# Altium PCB PCB1.PcbDoc (part 6 of 7)
Units mm, origin at the board's own origin, x right, y up, seen from the top; angles counter-clockwise.
Board outline 168 x 107.92 mm, 4 copper layers (Top Layer, POWER_LAYER, GND_LAYER, Bottom Layer), stack 1.182 mm thick; 507 components, 566 nets, 2495 pads, 1244 vias.
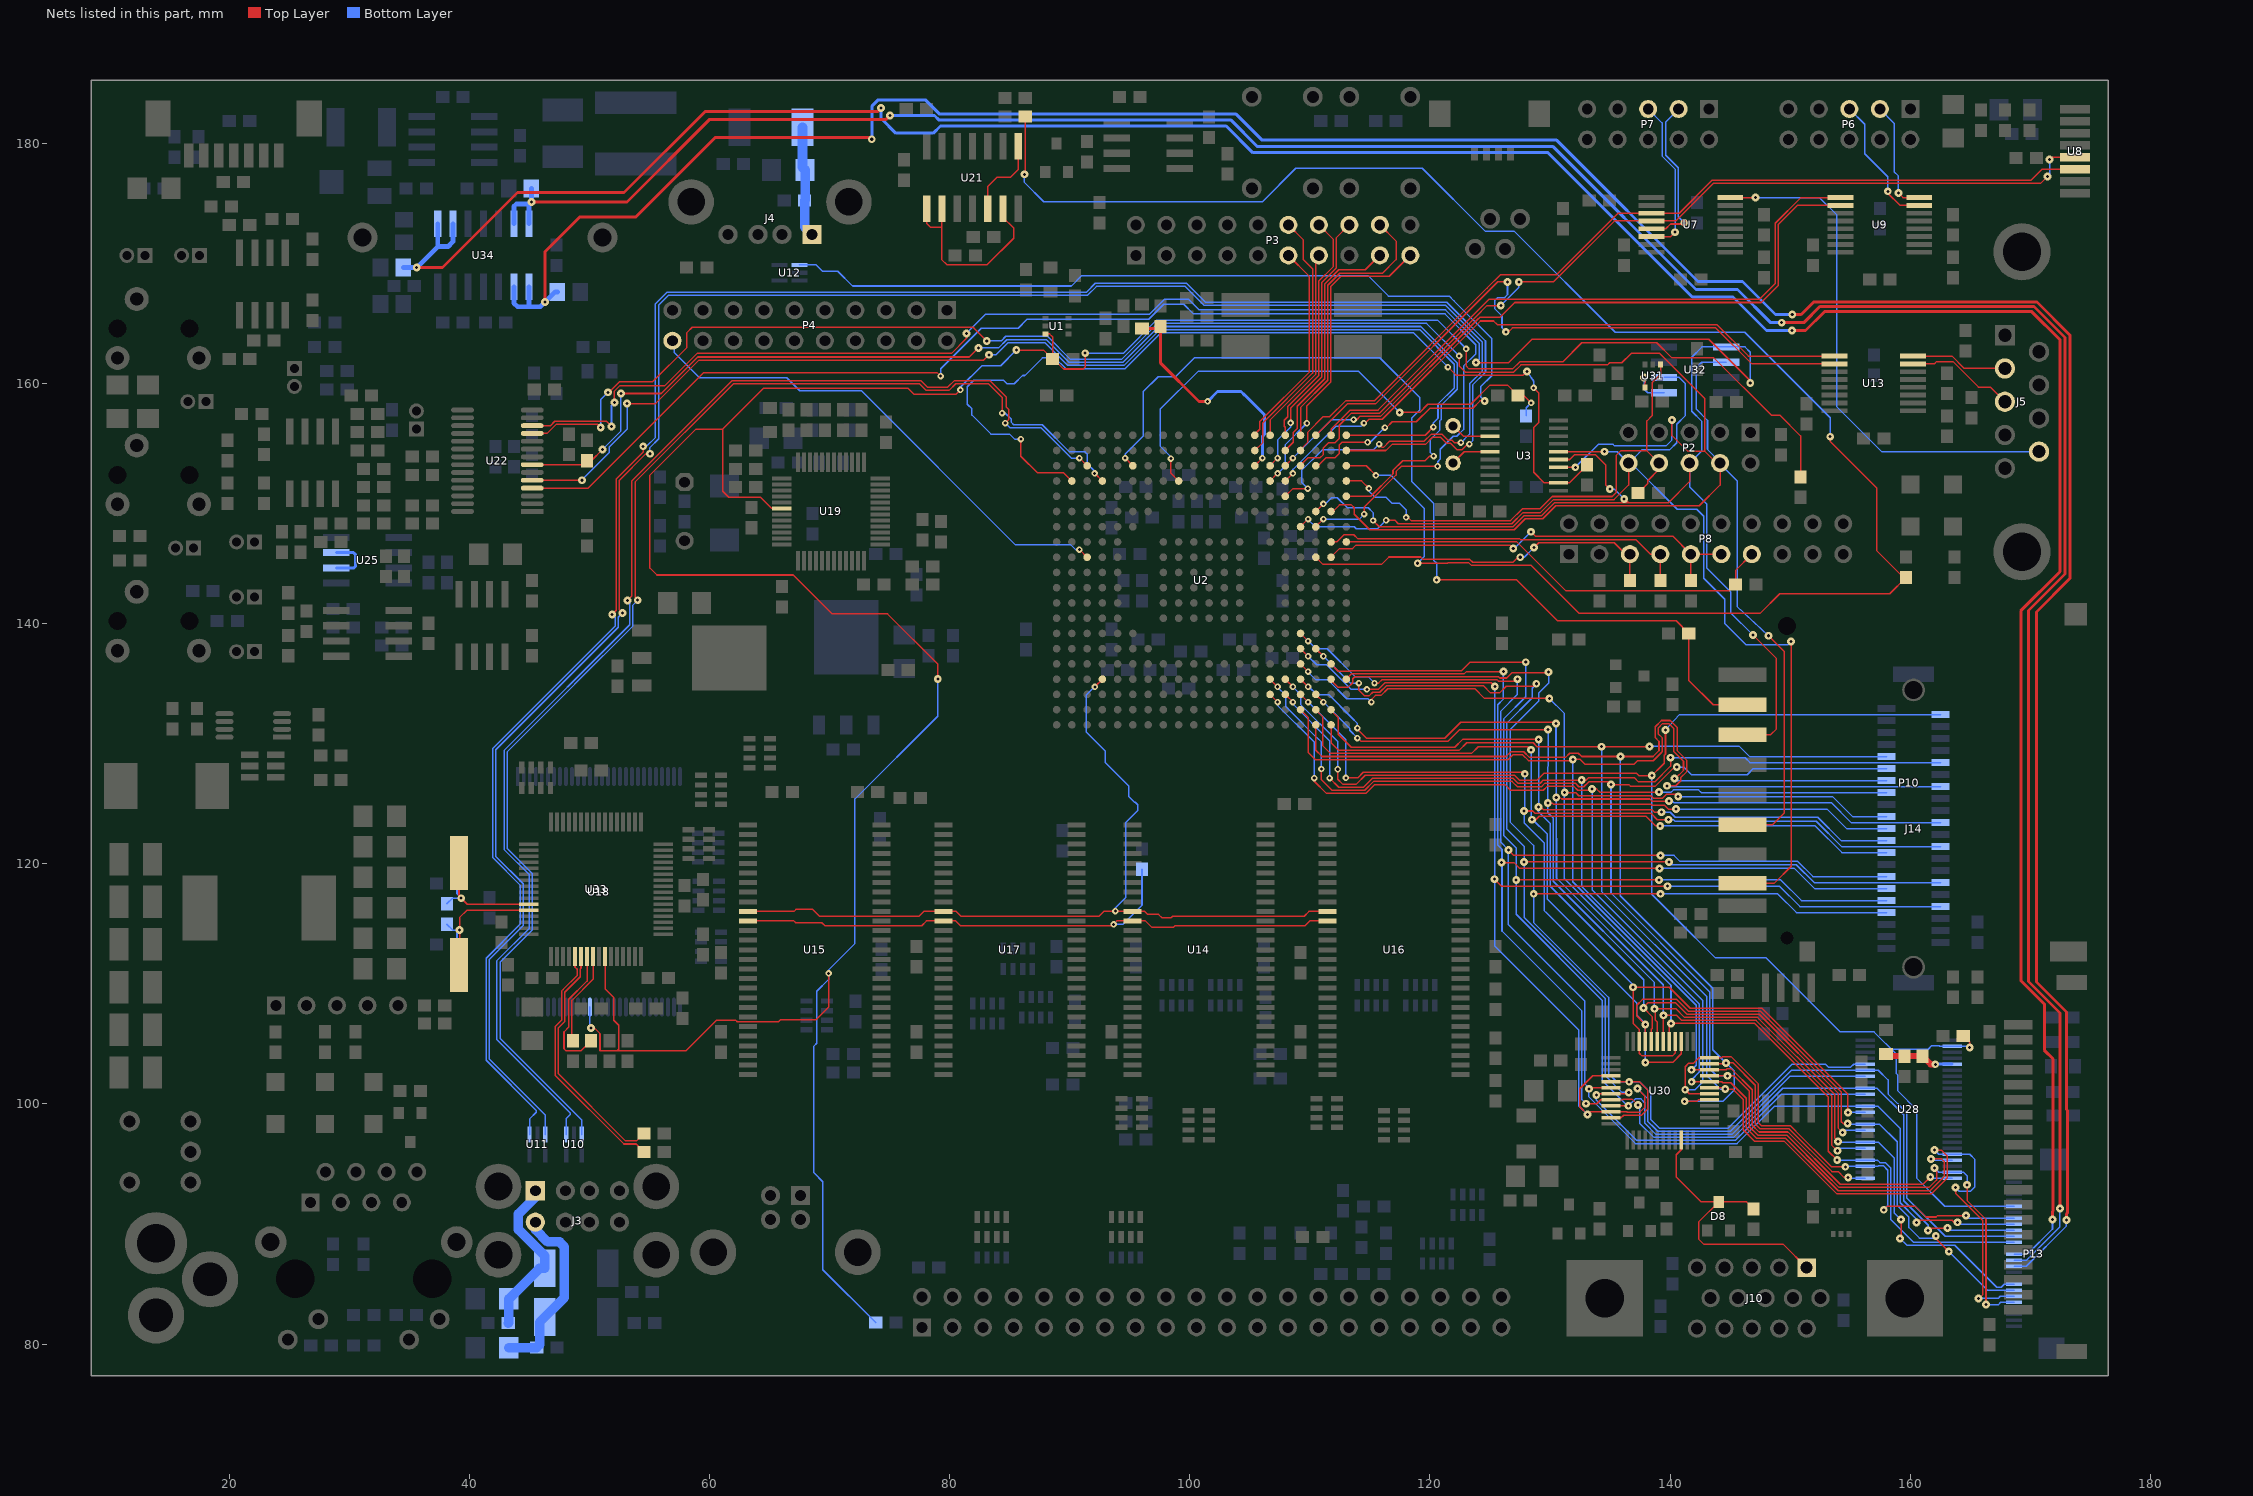
[diagram p8: the nets of this part, all layers, seen from the top]

## Via types
v1: diameter 0.54, hole 0.254, Top Layer to Bottom Layer, tented both sides, 504 vias
v2: diameter 0.65, hole 0.254, Top Layer to Bottom Layer, 387 vias
v3: diameter 0.65, hole 0.254, Top Layer to Bottom Layer, tented both sides, 325 vias
v4: diameter 0.54, hole 0.254, Top Layer to Bottom Layer, 25 vias
v5: diameter 1.27, hole 0.75, Top Layer to Bottom Layer, 2 vias
v6: diameter 0.65, hole 0.254, Top Layer to Bottom Layer, tented bottom, 1 vias

## Nets (pads, with @x,y where several pads share a name; then routed paths per layer and width w, separated by ;. In a path a pad name is that pad's centre, name@x,y a point inside that pad or via, vN(x,y) a via of type N, cw(c..) or ccw(c..) an arc to the next point about the centre after c; other vN are vias at no path point) (continued)
NetU2_V14: U2.V14 U22.4 | length 111.3
  Top Layer w0.127: U22.4@45.212,151.302 49.883,151.302 59.501,160.92 78.94,160.92 v1(79.24,160.62) ; U2.V14@110.49,148.082 110.49,148.09 v1(111.12,148.72) ; v1(114.52,149.14) 114.52,149.72 117.18,152.38 117.18,152.681 117.619,153.12 v1(120.64,153.12)
  Bottom Layer w0.127: v1(79.24,160.62) 79.24,161.24 82.62,164.62 85.7,164.62 86.44,165.36 96.567,165.36 97.827,166.62 99.494,166.62 100.306,165.808 121.252,165.808 123.82,163.24 123.82,162.481 122.8,161.461 122.8,156.18 122.24,155.62 121.94,155.62 120.86,154.54 120.86,153.72 120.64,153.5 v1(120.64,153.12) ; v1(111.12,148.72) 114.12,148.72 v1(114.52,149.14)
NetU2_V18: U2.V18 U12.1 | length 83.4
  Top Layer w0.127: U2.V18@110.49,153.162 110.682,153.162 111.34,153.82 112.08,153.82 112.44,154.18 112.44,154.88 112.68,155.12 v1(114.8,155.12) ; v1(116.24,156.34) 116.38,156.34 116.86,156.82 118.861,156.82 120.001,157.96 123.56,157.96 124.16,158.56 v3(124.56,158.56)
  Bottom Layer w0.127: U12.1@67.475,169.89 68.87,169.89 69.39,169.37 70.67,169.37 71.906,168.134 90.135,168.134 91.001,169 114.84,169 116.545,167.295 121.605,167.295 122.006,166.894 ; v1(114.8,155.12) 115.02,155.12 v1(116.24,156.34) ; 122.006,166.894 125.14,163.76 125.14,160.66 124.214,159.734 124.214,158.906 v3(124.56,158.56)
NetU2_Y20: U2.Y20 U22.5 | length 99.8
  Top Layer w0.127: U22.5@45.212,151.952 v3(49.372,151.952) ; v3(53.12,158.34) 55.484,158.34 59.104,161.96 82.82,161.96 v3(83.26,162.4) ; U2.Y20@113.03,155.702 119.602,155.702 v1(120.28,156.38)
  Bottom Layer w0.127: v3(49.372,151.952) 49.372,151.992 49.677,152.297 51.635,154.255 51.635,154.716 53.12,156.201 v3(53.12,158.34) ; v3(83.26,162.4) 83.84,162.4 84.84,163.4 87.941,163.4 89.826,161.515 94.518,161.515 97.503,164.5 119.14,164.5 122.02,161.62 122.02,159.644 120.67,158.294 120.67,157.117 120.28,156.727 v1(120.28,156.38)
NetU3_3: U3.3 Y2.2 | length 3.4
  Top Layer w0.127: Y2.2@121.92,156.49 122.778,155.632 U3.3@125.008,155.632
NetU3_5: U3.5 Y2.1 | length 3.5
  Top Layer w0.127: Y2.1@121.92,153.39 122.862,154.332 U3.5@125.008,154.332
NetU21_1: U21.1 U21.2 U21.6 | length 17.7
  Top Layer w0.127: U21.1@78.078,174.572 78.078,173.33 78.388,173.02 ; U21.2@79.348,174.572 79.348,173.02 ; U21.6@84.428,174.572 84.428,173.852 85.32,172.96 85.32,172.12 83.12,169.92 79.74,169.92 79.348,170.312 79.348,172.06 79.348,173.02 ; 78.388,173.02 79.348,173.02 ; 78.388,173.02 79.348,173.02
NetU21_5: U21.5 U21.8 | length 6.9
  Top Layer w0.127: U21.5@83.158,174.572 83.158,176.418 83.94,177.2 85.06,177.2 85.698,177.838 U21.8@85.698,179.772
NetU25_6: U25.6 U25.7 | length 4.3
  Bottom Layer w0.25: U25.6@28.896,144.653 30.373,144.653 30.48,144.76 30.48,145.78 30.337,145.923 U25.7@28.896,145.923
NetU31_4: U31.4 U32.1 | length 3.6
  Top Layer w0.127: v3(137.84,160.52) 137.92,160.36 U31.4@137.912,159.694
  Bottom Layer w0.127: v3(137.84,160.52) 137.84,159.54 138.134,159.246 U32.1@139.498,159.246
P0: J14.29 P13.8 U2.U7 U28.13 U30.18 | length 139
  Top Layer w0.127: U2.U7@109.22,139.192 109.85,138.562 v1(109.85,138.56) ; v1(115.38,135.06) 115.72,135.06 115.998,135.338 125.583,135.338 125.701,135.22 127.12,135.22 v3(127.28,135.38) ; v3(126.54,121.14) 126.98,120.7 v3(139.2,120.7) ; v3(133.24,101.26) 133.322,101.342 U30.18@135.092,101.342 ; v3(160.54,90.12) 160.72,90.3 163.5,90.3 163.66,90.14 v3(163.94,90.14)
  Bottom Layer w0.127: v1(109.85,138.56) 109.86,138.56 110.5,137.92 111.44,137.92 113.76,135.6 114.84,135.6 v1(115.38,135.06) ; v3(127.28,135.38) 127.28,134.1 125.908,132.728 125.908,121.792 126.54,121.16 126.54,114.92 132.908,108.552 132.908,101.666 133.234,101.34 v3(133.24,101.26) 133.24,100.58 137.12,96.7 145.58,96.7 148.69,99.81 157.33,99.81 159.18,97.96 159.18,91.76 160.54,90.4 v3(160.54,90.12) ; v3(139.2,120.7) 140.34,120.7 140.84,120.2 150.64,120.2 151.904,118.936 J14.29@158.036,118.936 ; v3(163.94,90.14) 164.268,89.972 P13.8@168.656,89.972
P1: J14.30 U2.V6 U28.15 U30.19 | length 124.8
  Top Layer w0.127: U2.V6@110.49,137.922 v1@111.12,137.292 ; v1(114.08,135.06) 114.08,134.46 114.52,134.02 114.96,134.02 115.226,134.286 115.826,134.286 116.37,134.83 124.45,134.83 125.04,134.24 125.8,134.24 126.36,134.8 128.66,134.8 v3(128.86,135) ; v3(127.84,120.16) v3(139.9,120.16) ; v3(133.86,100.74) 133.962,100.842 136.442,100.842 v3(136.56,100.96)
  Bottom Layer w0.127: v1@111.13,137.29 113.36,135.06 v1(114.08,135.06) ; v3@128.86,134.96 128.52,134.62 128.52,133.84 126.416,131.736 126.416,122.884 127.872,121.428 127.872,115.508 134.62,108.76 134.62,102.34 136,100.96 v3(136.56,100.96) ; v3@133.92,100.74 v3(133.86,100.74) 133.86,100.319 137.225,96.954 145.434,96.954 149.29,100.81 U28.15@156.254,100.81 ; v3(139.9,120.16) 140.14,119.92 150.52,119.92 152.004,118.436 J14.30@162.536,118.436
  other v1: 111.12,137.29
P2: J14.31 P13.9 U2.Y4 U28.16 U30.20 | length 134.7
  Top Layer w0.127: U2.Y4@113.03,135.382 113.03,135.39 113.486,135.846 122.866,135.846 123.04,136.02 v3(126.12,136.02) ; v3(125.96,120.1) 127,120.1 127.48,119.62 v3(139.12,119.62) ; v3(133,100.02) 133.9,100.02 134.222,100.342 U30.20@135.092,100.342 ; U30.20@135.095,100.288 136.022,100.342 136.08,100.4 136.84,100.4 v3(137.34,99.9) ; v3(161.5,89.46) 161.7,89.66 v3(163.1,89.66)
  Bottom Layer w0.127: v3(126.12,136.02) 126.12,133.72 125.654,133.254 125.654,121.566 126,121.22 126,114.4 132.654,107.746 132.654,100.366 v3(133,100.02) ; v3(137.34,99.9) 137.48,99.76 137.48,98.38 138.652,97.208 145.288,97.208 149.39,101.31 157.25,101.31 159.46,99.1 159.46,91.94 161.5,89.9 v3(161.5,89.46) ; v3(139.12,119.62) 150.36,119.62 152.044,117.936 J14.31@158.036,117.936 ; v3(163.1,89.66) 163.288,89.472 P13.9@168.656,89.472
P3: J14.33 U2.W5 U28.18 U30.21 | length 116
  Top Layer w0.127: U2.W5@111.76,136.652 111.76,136.64 112.36,136.04 113.32,136.04 113.38,136.1 122.64,136.1 123.34,136.8 v3(127.98,136.8) ; v3(127.18,118.66) v3(139.08,118.66) ; U30.21@135.092,99.842 v3(136.52,99.84)
  Bottom Layer w0.127: v3(127.98,136.8) 127.98,133.92 126.162,132.102 126.162,122.338 127.183,121.317 127.183,115.797 134.36,108.62 134.36,101.94 136.46,99.84 v3(136.52,99.84) 137.1,100.42 137.58,100.42 137.9,100.1 137.9,98.4 138.838,97.462 145.154,97.462 150.002,102.31 U28.18@156.254,102.31 ; v3(139.08,118.66) 149.22,118.66 150.944,116.936 J14.33@158.036,116.936
P4: J14.34 P13.10 U2.U6 U28.19 U30.16 U30.22 | length 154.6
  Top Layer w0.127: U2.U6@109.22,137.922 109.85,137.292 v1(109.85,137.29) ; v1@114.74,134.54 115.72,134.54 116.264,135.084 125.096,135.084 v3(125.4,134.78) ; v3(125.38,118.72) 125.96,118.14 v3(139.78,118.14) ; U30.16@135.092,102.342 133.562,102.342 132.48,101.26 132.48,99.76 v3(133.12,99.12) 133.342,99.342 136.387,99.342 136.409,99.32 137.506,99.32 137.88,99.694 137.88,100.68 v3(137.28,101.28)
  Bottom Layer w0.127: v1(109.85,137.29) 110.56,136.58 111.38,136.58 113.42,134.54 v1@114.74,134.54 ; v3(125.4,134.78) 125.4,113.16 132.4,106.16 132.4,99.84 v3(133.12,99.12) ; v3(137.28,101.28) 138.154,100.406 138.154,98.505 138.943,97.716 145.034,97.716 150.128,102.81 157.35,102.81 158.162,101.998 158.162,100.818 159.72,99.26 159.72,92.172 162.92,88.972 P13.10@168.656,88.972 ; 138.48,98.22 138.984,97.716 ; v3(139.78,118.14) 149.12,118.14 150.824,116.436 J14.34@162.536,116.436
  other v1: 114.74,134.54
P5: J14.35 U2.W4 U28.20 U30.17 U30.23 | length 122.7
  Top Layer w0.127: U2.W4@111.76,135.382 111.76,135.3 112.36,134.7 113.18,134.7 113.56,135.08 113.56,135.42 113.732,135.592 125.688,135.592 125.8,135.48 126.4,135.48 126.82,135.9 129.8,135.9 v3(129.88,135.98) ; v3(128.64,117.5) v3(139.2,117.5) ; U30.23@135.092,98.842 135.922,98.842 136.14,99.06 137.62,99.06 138.134,99.574 138.134,101.168 137.46,101.842 U30.17@135.092,101.842
  Bottom Layer w0.127: v3(129.88,135.98) 129.88,135.04 129.06,134.22 129.06,133.56 126.67,131.17 126.67,123.49 128.63,121.53 128.63,115.11 134.874,108.866 134.874,102.526 135.558,101.842 137.46,101.842 138.408,100.894 138.408,98.672 139.11,97.97 144.83,97.97 150.17,103.31 152.94,103.31 153.186,103.064 155.054,103.064 155.3,103.31 U28.20@156.254,103.31 ; v3(139.2,117.5) 148.96,117.5 150.524,115.936 J14.35@158.036,115.936
  other v3: 136.598,101.842
P6: J14.19 P13.11 U2.U5 U28.4 U30.5 | length 125
  Top Layer w0.127: U2.U5@109.22,136.652 v1@109.85,136.022 ; v1(115.12,133.48) 115.12,133.7 115.452,134.032 115.932,134.032 116.476,134.576 123.744,134.576 124.54,133.78 v3(129.94,133.78) ; v3(131.22,125.94) 132.141,125.94 132.401,125.68 138.4,125.68 138.62,125.46 139.36,125.46 139.68,125.78 140.5,125.78 v3(140.68,125.6) ; U30.5@139.942,105.192 139.942,106.562 v3(140.08,106.7) 147.06,106.7 153.18,100.58 153.18,96.06 v3(153.92,95.32)
  Bottom Layer w0.127: v1(109.85,136.02) 109.85,135.97 110.5,135.32 111.5,135.32 113.06,133.76 114.84,133.76 v1(115.12,133.48) ; v3(129.94,133.78) 131.2,132.52 131.2,118.76 140.08,109.88 v3(140.08,106.7) ; v3(140.68,125.6) 153.54,125.6 155.204,123.936 J14.19@158.036,123.936 ; v3(153.92,95.32) 153.93,95.31 157.29,95.31 157.486,95.114 157.926,95.114 158.4,94.64 158.4,90.36 160.288,88.472 P13.11@168.656,88.472
P7: J14.20 U2.U4 U28.6 U30.6 | length 111.2
  Top Layer w0.127: U2.U4@109.22,135.382 v1@109.85,134.752 ; v1(113.96,131.3) 113.96,131.22 114.715,130.465 121.225,130.465 122.56,131.8 130.38,131.8 v3(130.5,131.68) ; v3(130.52,125.52) 130.84,125.52 130.96,125.4 138.321,125.4 138.521,125.2 139.76,125.2 v3(139.9,125.24) ; U30.6@139.442,105.192 v3(139.442,107.378) 140.542,107.378 140.966,106.954 147.166,106.954 153.46,100.66 153.46,96.58 v3(153.94,96.1)
  Bottom Layer w0.127: v1(109.85,134.75) 109.91,134.75 110.56,134.1 111.56,134.1 113.49,132.17 113.96,131.7 v1(113.96,131.3) ; v3(130.5,131.68) 130.519,125.52 130.54,118.82 139.442,109.918 v3(139.442,107.378) ; v3(139.9,125.24) 140.18,125.24 140.34,125.08 153.44,125.08 155.084,123.436 J14.20@162.536,123.436 ; v3(153.94,96.1) 154.15,96.31 U28.6@156.254,96.31
P8: J14.21 P13.18 U2.V3 U28.7 U30.7 | length 125.7
  Top Layer w0.127: U2.V3@110.49,134.112 v1@111.12,133.482 ; v1(113.96,130.48) 113.997,130.48 114.266,130.211 121.511,130.211 122.48,131.18 v3(129.84,131.18) ; v3(129.82,125.06) 130.2,125.06 130.3,124.96 138.402,124.96 138.482,124.88 139.531,124.88 139.851,124.56 v3(140.5,124.56) ; U30.7@138.942,105.192 138.942,106.82 138.754,107.008 138.754,107.866 v3(138.7,107.92) 140.494,107.92 141.206,107.208 147.292,107.208 153.72,100.78 153.72,97.16 v3(154,96.88) ; v3(159.16,88.8) 159.24,88.88 v3(159.24,90.36)
  Bottom Layer w0.127: v1(111.12,133.48) 113.32,131.28 113.32,131.12 v1(113.96,130.48) ; v3(129.82,125.06) 129.82,124.26 130.27,123.81 130.27,118.55 138.7,110.12 v3(138.7,107.92) ; v3@129.83,125.06 v3(129.84,131.18) ; v3(140.5,124.56) 153.08,124.56 154.704,122.936 J14.21@158.036,122.936 ; v3@154.07,96.81 157.37,96.81 158.66,95.52 158.66,90.94 v3(159.24,90.36) ; v3(159.16,88.8) 159.742,88.218 163.722,88.218 167.214,84.726 167.586,84.726 167.832,84.972 P13.18@168.656,84.972
P9: J14.23 U2.W2 U28.9 U30.8 | length 103.9
  Top Layer w0.127: U2.W2@111.76,132.842 111.76,132.78 112.36,132.18 112.36,130.789 113.446,129.703 122.063,129.703 122.72,130.36 v3(129.06,130.36) ; v3(129.04,124.74) 129.22,124.74 129.44,124.52 138.482,124.52 138.702,124.3 v3(139.28,124.3) ; U30.8@138.442,105.192 138.442,106.222 138.5,106.28 138.5,107.28 v3(137.8,107.98) 137.8,108.06 138.18,108.44 140.428,108.44 141.406,107.462 147.438,107.462 154,100.9 154,98 v3(154.38,97.62)
  Bottom Layer w0.127: v3(129.04,124.74) 129.04,124.34 130.016,123.364 130.016,118.124 137.8,110.34 v3(137.8,107.98) ; v3@129.05,124.74 v3(129.06,130.36) ; v3(139.28,124.3) 140.02,124.3 140.44,123.88 152.3,123.88 154.244,121.936 J14.23@158.036,121.936 ; v3(154.38,97.62) 154.57,97.81 U28.9@156.254,97.81
P10: J14.24 P13.19 U2.U3 U28.10 U30.3 U30.9 | length 142.3
  Top Layer w0.127: U2.U3@109.22,134.112 v1@109.85,133.482 ; v1(113,127.16) 113.98,127.16 114.446,127.626 127.774,127.626 v3(127.9,127.5) ; v3(127.84,124.4) 128.56,124.4 128.74,124.22 129.36,124.22 ; 129.37,124.23 138.39,124.23 138.94,123.68 v3(139.88,123.68) ; v2(137.94,103.46) 140.22,103.46 140.942,104.182 U30.3@140.942,105.192 ; v3@137.94,106.62 137.22,107.34 137.22,108.22 137.7,108.7 140.562,108.7 141.546,107.716 147.544,107.716 154.26,101 154.26,98.52 154.42,98.36 v3(154.8,98.36) ; U30.9@137.942,105.192 v3(137.942,106.62) ; v3(162.14,89) 162.14,88.78 v3(163.22,87.7)
  Bottom Layer w0.127: v1@109.86,133.48 111.5,131.84 113,130.34 v1(113,127.16) ; v3(127.84,124.4) 127.84,123.42 129.508,121.752 129.508,116.112 129.741,115.879 137.24,108.38 137.24,107.38 v3@137.942,106.678 ; v3@127.9,124.4 v3(127.9,127.5) ; v2@137.942,103.462 v3(137.942,106.62) ; v3(139.88,123.68) 140.281,123.68 140.421,123.54 152.18,123.54 154.284,121.436 J14.24@162.536,121.436 ; v3@154.85,98.31 157.45,98.31 158.92,96.84 158.92,91.54 159.9,90.56 159.9,89.7 160.78,88.82 162.02,88.82 v3(162.14,89) ; v3(163.22,87.7) 166.448,84.472 P13.19@168.656,84.472
  other v1: 109.85,133.48
P11: J14.25 U2.V2 U28.12 U30.4 U30.10 | length 109.8
  Top Layer w0.127: U2.V2@110.49,132.842 110.49,132.81 111.08,132.22 111.08,129.821 111.706,129.195 123.455,129.195 124.02,129.76 128.16,129.76 v3(128.42,129.5) ; v3(128.5,123.68) 128.82,123.68 129.106,123.966 137.994,123.966 138.8,123.16 v3(139.18,123.16) ; U30.4@140.442,105.192 140.442,104.24 140.202,104 137.66,104 137.442,104.218 137.442,106.198 136.92,106.72 v3(136.92,109.72) 139.936,109.72 141.686,107.97 147.65,107.97 154.82,100.8 v3(154.82,99.28)
  Bottom Layer w0.127: v3(128.42,129.5) 128.428,125.28 v3@128.43,123.68 ; v3(128.5,123.68) 128.556,123.68 129.762,122.474 129.762,117.078 130.081,116.759 136.92,109.92 v3(136.92,109.72) ; v3(139.18,123.16) 152.1,123.16 154.324,120.936 J14.25@158.036,120.936 ; v3(154.82,99.28) 154.85,99.31 U28.12@156.254,99.31
P12: J14.9 P13.20 U2.W1 U28.44 U30.43 | length 131.6
  Top Layer w0.127: U2.W1@111.76,131.572 111.76,130.095 112.406,129.449 122.429,129.449 123.06,130.08 128.6,130.08 128.92,129.76 138.28,129.76 v3(138.3,129.78) ; U30.43@143.292,101.342 144.498,101.342 v3(144.6,101.24) 145.219,101.24 146.09,100.369 146.09,97.85 147.06,96.88 149.524,96.88 152.86,93.544 153.904,92.5 161.76,92.5 163.1,93.84 163.1,95.66 162.6,96.16 v3(162.04,96.16) ; v3(163.78,93.04) 163.78,92.561 166.066,90.275 166.066,84.126 165.74,83.8 v3(165.7,83.8)
  Bottom Layer w0.127: v3(134.3,129.76) 134.3,117.7 143.054,108.946 143.054,102.366 144.18,101.24 v3(144.6,101.24) ; v3(138.3,129.78) 145.78,129.78 146.624,128.936 J14.9@158.036,128.936 ; v3(162.04,96.16) 162.39,95.81 164.97,95.81 165.4,95.38 165.4,93.1 165.026,92.726 164.094,92.726 v3(163.78,93.04) ; v3(165.7,83.8) 167.34,83.8 167.512,83.972 P13.20@168.656,83.972
P13: J14.10 U2.T3 U28.45 U30.44 | length 122.4
  Top Layer w0.127: U2.T3@107.95,134.112 108.58,133.482 v1(108.58,133.48) ; v1(111.64,127.14) 112.4,126.38 114.462,126.38 115.2,127.118 126.943,127.118 127.341,126.72 129.18,126.72 129.44,126.98 133.021,126.98 133.221,127.18 137.02,127.18 137.38,126.82 138.72,126.82 140.04,128.14 v3(140.04,128.84) ; v3(141.8,101.84) U30.44@143.292,101.842 144.302,101.842 144.384,101.76 145.058,101.76 146.344,100.474 146.344,97.988 147.192,97.14 149.623,97.14 153.214,93.549 154.003,92.76 161.661,92.76 162.846,93.945 162.846,95.194 162.62,95.42 v3(161.74,95.42)
  Bottom Layer w0.127: v1(108.58,133.48) 108.58,133.32 111.64,130.26 v1(111.64,127.14) ; v3(132.64,126.98) 132.64,118.12 142.44,108.32 142.44,102.66 141.8,102.02 v3(141.8,101.84) ; v3(140.04,128.84) 146.256,128.84 146.66,128.436 J14.10@162.536,128.436 ; v3(161.74,95.42) 161.85,95.31 U28.45@163.504,95.31
P14: J14.11 P13.21 U2.R4 U28.47 U30.45 | length 131.2
  Top Layer w0.127: U2.R4@106.68,135.382 v1@107.31,134.752 ; v1(110.96,127.9) 110.96,127 111.84,126.12 114.561,126.12 115.301,126.86 126.842,126.86 127.282,126.42 129.28,126.42 129.586,126.726 132.094,126.726 132.4,126.42 132.82,126.42 133.22,126.82 134.86,126.82 v3(135.08,126.6) 136.58,126.6 136.7,126.48 138.78,126.48 140.36,128.06 v3(140.56,128.06) ; U30.45@143.292,102.342 145.325,102.342 146.598,101.069 146.598,98.1 147.298,97.4 149.722,97.4 152.976,94.146 154.082,93.04 161.582,93.04 162.2,93.658 162.2,94.5 v3(162.04,94.66) ; v3(164.74,93.26) 164.74,91.96 166.32,90.38 v3(166.32,83.28)
  Bottom Layer w0.127: v1(107.31,134.75) 107.31,134.71 108,134.02 108,133.08 110.59,130.49 ; 110.6,130.5 110.96,130.14 v1(110.96,127.9) ; v3(135.08,126.6) 135.08,117.56 143.308,109.332 143.308,102.932 143.898,102.342 v3(144.798,102.342) ; v3(140.56,128.06) 141.14,128.06 141.78,127.42 146.424,127.42 146.94,127.936 J14.11@158.036,127.936 ; v3(162.04,94.66) 162.39,94.31 164.45,94.31 164.74,94.02 v3(164.74,93.26) ; v3(166.32,83.28) 167.36,83.28 167.552,83.472 P13.21@168.656,83.472
P15: J14.13 U2.U2 U28.48 U30.46 | length 120
  Top Layer w0.127: U2.U2@109.22,132.842 109.22,132.84 109.86,132.2 109.86,129.28 110.453,128.687 126.527,128.687 126.92,129.08 127.72,129.08 128.2,128.6 131.8,128.6 v3(131.9,128.7) 132.521,128.7 132.921,128.3 137,128.3 137.28,128.58 138.6,128.58 ; 139.306,129.286 138.6,128.58 ; v3(140.36,127.12) 140.46,127.12 141.12,127.78 141.12,128.54 140.3,129.36 140.3,131.28 139.9,131.68 139.38,131.68 139.02,131.32 139.02,130.82 139.366,130.474 139.366,129.366 138.6,128.6 138.6,128.58 ; v3(141.782,102.842) 144.672,102.842 144.741,102.911 145.115,102.911 146.852,101.174 146.852,98.228 147.42,97.66 149.822,97.66 154.182,93.3 161.08,93.3 v3(161.68,93.9)
  Bottom Layer w0.127: v3(131.9,128.7) 131.9,118.5 142.18,108.22 142.18,103.22 141.802,102.842 v3(141.782,102.842) ; v3(140.36,127.12) 140.544,126.936 J14.13@158.036,126.936 ; v3(161.68,93.9) 161.77,93.81 U28.48@163.504,93.81
P16: J14.14 U2.V1 U28.1 U30.41 U30.47 | length 122.5
  Top Layer w0.127: U2.V1@110.49,131.572 110.49,129.457 111.006,128.941 126.341,128.941 126.74,129.34 127.82,129.34 128.3,128.86 131.28,128.86 131.64,129.22 132.36,129.22 132.64,128.94 138.58,128.94 139.08,129.44 139.08,130.2 138.76,130.52 138.76,131.42 139.28,131.94 140.02,131.94 140.58,131.38 140.58,129.439 141.38,128.639 141.38,127.66 140.9,127.18 140.9,126.92 140.48,126.5 v3(139.74,126.5) ; v3(141.22,100.22) 142.24,100.22 142.362,100.342 U30.41@143.292,100.342 ; U30.47@143.292,103.342 144.582,103.342 v3(144.66,103.42) 145.241,103.42 147.106,101.555 147.106,98.334 147.52,97.92 149.921,97.92 153.481,94.36 154.02,94.36 154.5,93.88 v3(154.84,93.88)
  Bottom Layer w0.127: v3(135.86,128.94) 135.86,117.34 143.562,109.638 143.562,104.518 145.36,102.72 145.36,101.18 144.4,100.22 v3(141.22,100.22) ; v3(139.74,126.5) 139.804,126.436 J14.14@162.536,126.436 ; v3(154.84,93.88) 154.91,93.81 U28.1@156.254,93.81
P17: J14.15 P13.7 U2.R3 U28.3 U30.42 U30.48 | length 130.1
  Top Layer w0.127: U2.R3@106.68,134.112 v1@107.31,133.482 ; v1(110.36,127.14) 110.36,126.88 111.38,125.86 114.66,125.86 115.4,126.6 126.24,126.6 126.72,126.12 129.434,126.12 129.786,126.472 131.968,126.472 132.32,126.12 133.38,126.12 v3(133.5,126.24) 133.88,126.24 134.14,125.98 v3(139.08,125.98) ; U30.42@143.292,100.842 141.598,100.842 v3(141.26,101.18) 141.26,103.1 141.548,103.388 141.948,103.388 142.402,103.842 144.282,103.842 144.38,103.94 145.08,103.94 147.36,101.66 147.36,98.44 147.62,98.18 150.04,98.18 150.46,97.76 ; 150.45,97.75 153.44,94.76 v3(154.6,94.76) ; v3(157.8,91.18) 158.08,91.46 160.44,91.46 161.32,90.58 162.16,90.58 162.28,90.7 v3(164.66,90.7)
  Bottom Layer w0.127: v1(107.31,133.48) 107.31,133.19 110.15,130.35 ; 110.16,130.36 110.36,130.16 v1(110.36,127.14) ; v3(133.5,126.24) 133.5,117.84 142.74,108.6 142.74,101.84 142.08,101.18 v3(141.26,101.18) ; v3@139.124,125.936 v3(139.08,125.98) 140.1,125.98 140.28,126.16 142.376,126.16 142.6,125.936 J14.15@158.036,125.936 ; v3@154.65,94.81 157.31,94.81 157.36,94.86 157.76,94.86 158.14,94.48 158.14,91.52 v3(157.8,91.18) ; v3(164.66,90.7) 164.908,90.472 P13.7@168.656,90.472
PLL_VDD: C54.2 L1.2 U2.P18 | length 20.6
  Top Layer w0.127: C54.2@97.386,164.608 C54.2@97.536,164.758 ; U2.P18@105.41,153.162 105.41,153.17 v1(106.04,153.8)
  Top Layer w0.25: L1.2@96.012,164.608 C54.2@97.386,164.608 ; C54.2@97.536,164.758 97.536,161.744 100.76,158.52 v1(101.48,158.52)
  Bottom Layer w0.127: 104.577,159.023 104.597,159.023
  Bottom Layer w0.25: v1(101.48,158.52) 102.3,159.34 104.26,159.34 104.577,159.023 ; 104.44,159.18 106.22,157.4 106.22,155.76 106.04,155.58 v1(106.04,153.8)
PLLVCC: C202.1 C204.2 L9.2 U28.29 | length 5.9
  Top Layer w0.127: L9.2@157.988,104.156 L9.2@158.17,103.974
  Top Layer w0.5: L9.2@158.17,103.974 C202.1@161.036,103.974 161.71,103.3 v2(162.1,103.3)
  Bottom Layer w0.127: v2(162.1,103.3) v2@162.11,103.31
  Bottom Layer w0.25: v2@162.11,103.31 162.96,103.31 U28.29@163.504,103.31
PWMOUT: U2.U16
PWR_USB0: C92.2 C95.2 F1.2 J3.1 | length 14.1
  Bottom Layer w0.8: C95.2@43.222,81.732 43.264,81.774 C92.2@43.264,83.764 45.804,86.304 F1.2@46.266,86.304 46.266,87.334 44.06,89.54 44.06,90.84 45.476,92.256 J3.1@45.476,92.77
PWR_USB1: C93.2 C96.2 F2.2 J3.5 | length 15.3
  Bottom Layer w0.8: C93.2@43.264,79.7 C96.2@45.586,79.7 45.84,79.954 45.84,81.814 47.9,83.874 47.9,88.08 47.474,88.506 ; J3.5@45.476,90.15 45.476,89.524 46.494,88.506 47.494,88.506
PWR_USB2: C94.2 C97.2 F3.2 J4.1 | length 9.2
  Bottom Layer w0.8: F3.2@67.734,181.356 67.734,178.014 C94.2@67.948,177.8 C97.2@67.948,175.302 ; C97.2@67.906,175.26 67.906,173.048 J4.1@68.524,172.43
RDLED: R6.2 R87.2 U2.Y18 | length 155.6
  Top Layer w0.127: v3(86.22,177.44) 86.294,177.514 R87.2@86.294,182.252 ; U2.Y18@113.03,153.162 114.698,153.162 v1(115.5,152.36) ; v3(118.98,145.04) 121.46,145.04 121.52,145.1 123.219,145.1 123.458,144.861 128.439,144.861 132.44,140.86 147.5,140.86 149.14,142.5 158.294,142.5 R6.2@159.652,143.858 159.442,143.858 157.2,146.1 157.2,151.32 153.34,155.18 v6(153.34,155.58)
  Bottom Layer w0.127: v3(86.22,177.44) 86.22,176.76 87.82,175.16 106.04,175.16 108.82,177.94 119.36,177.94 124.62,172.68 127.04,172.68 135.44,164.28 146.22,164.28 153.34,157.16 v6(153.34,155.58) ; v1(115.5,152.36) 116.78,152.36 119.512,149.628 119.512,145.572 v3(118.98,145.04)
READY: P4.20 U2.C12 | length 42.5
  Top Layer w0.127: v1(90.8,146.18) 90.802,146.18 U2.C12@91.44,145.542
  Bottom Layer w0.127: P4.20@56.896,163.576 57.06,163.412 57.06,162.58 59.143,160.497 66.414,160.497 67.505,159.406 72.634,159.406 85.474,146.566 90.094,146.566 90.48,146.18 v1(90.8,146.18)
RED: D8.3 J10.1 R137.2 U30.34 | length 24.6
  Top Layer w0.127: U30.34@140.942,96.992 140.942,96.182 140.52,95.76 140.52,93.92 142.604,91.836 146.374,91.836 R137.2@146.956,91.254 ; D8.3@144.052,91.832 142.38,90.16 142.38,88.74 142.82,88.3 149.444,88.3 J10.1@151.384,86.36
  Top Layer w0.2: D8.3@144.052,91.832 D8.3@144.052,91.836
RI0-RS232: J5.9 U7.8 | length 43.9
  Top Layer w0.127: U7.8@145.007,175.503 v3(147.123,175.503)
  Bottom Layer w0.127: v3(147.123,175.503) 152.437,175.503 153.9,174.04 153.9,158.06 157.619,154.341 J5.9@170.736,154.341
ROW0: P3.19 U2.R17 | length 26
  Top Layer w0.127: U2.R17@106.68,151.892 106.68,151.9 v1(107.31,152.53) ; v1(109.74,156.7) 109.74,158.14 111.74,160.14 111.74,168.1 112.58,168.94 116.616,168.94 P3.19@118.364,170.688
  Bottom Layer w0.127: v1(107.31,152.53) 107.33,152.53 107.96,153.16 107.96,154.92 v1(109.74,156.7)
ROW1: P3.18 U2.U20 | length 23.5
  Top Layer w0.127: U2.U20@109.22,155.702 109.22,158.02 111.486,160.286 111.486,168.206 112.48,169.2 116.04,169.2 117.18,170.34 117.18,171.872 P3.18@115.824,173.228
ROW2: P3.17 U2.T19 | length 20.8
  Top Layer w0.127: U2.T19@107.95,154.432 107.95,154.45 108.62,155.12 108.62,155.94 108.94,156.26 108.94,158.114 111.232,160.406 111.232,168.312 112.4,169.48 114.616,169.48 P3.17@115.824,170.688
ROW3: P3.16 U2.R18 | length 22.8
  Top Layer w0.127: U2.R18@106.68,153.162 106.68,153.17 v1(107.31,153.8) ; v1(108.4,156.74) 108.4,157.974 110.978,160.552 110.978,168.418 112.18,169.62 112.18,172.124 P3.16@113.284,173.228
  Bottom Layer w0.127: v1(107.31,153.8) 107.31,155.31 108.4,156.4 v1(108.4,156.74)
ROW4: P3.14 U2.T20 | length 19.7
  Top Layer w0.127: U2.T20@107.95,155.702 107.95,156.37 107.86,156.46 107.86,156.955 108.146,157.241 108.146,158.088 110.724,160.666 110.724,168.524 111.926,169.726 111.926,172.046 P3.14@110.744,173.228
ROW5: P3.13 U2.R20 | length 16.7
  Top Layer w0.127: U2.R20@106.68,155.702 106.68,156.981 110.47,160.771 110.47,170.414 P3.13@110.744,170.688
ROW6: P3.12 U2.P19 | length 21.6
  Top Layer w0.127: U2.P19@105.41,154.432 105.412,154.432 106.08,155.1 106.08,156.74 110.216,160.876 110.216,169.564 109.46,170.32 109.46,171.972 P3.12@108.204,173.228
ROW7: P3.11 U2.P20 | length 17.6
  Top Layer w0.127: U2.P20@105.41,155.702 105.41,155.79 105.826,156.206 105.826,156.846 109.962,160.982 109.962,168.93 P3.11@108.204,170.688
RTC_CS: R7.2 U2.B17 U3.12 | length 79.4
  Top Layer w0.127: v1(85.92,155.38) 85.92,153.96 87.32,152.56 89.5,152.56 90.168,151.892 U2.B17@90.17,151.892 ; v1@121.52,161.38 v1(121.5,161.38) 122.166,160.714 127.774,160.714 v3(128.08,161.02) ; v1(128.64,159.64) 129.06,159.22 129.06,156.76 128.64,156.34 128.64,152.62 129.528,151.732 131.612,151.732 133.096,153.216 R7.2@133.096,153.25
  Bottom Layer w0.127: v1(85.92,155.38) 85.398,155.38 84.978,155.8 83.424,155.8 81.84,157.384 81.84,157.901 81.46,158.281 81.46,159.74 82,160.28 84.48,160.28 84.766,159.994 85.375,159.994 86.061,160.68 86.26,160.68 87.72,162.14 88.773,162.14 89.652,161.261 94.624,161.261 95.949,162.586 97.602,164.24 118.64,164.24 v1(121.5,161.38) ; v3(128.08,161.02) 128.64,160.2 v1(128.64,159.64)
RTCXTALI: R13.2 R14.2 U2.J17 | length 43
  Top Layer w0.127: v1(98.42,153.76) 98.42,152.53 98.422,152.53 U2.J17@99.06,151.892 ; v3(117.48,157.6) 119.14,157.6 119.82,158.28 123.4,158.28 125,159.88 126.466,159.88 R14.2@127.342,159.004 127.816,159.004 v1(128.42,158.4)
  Bottom Layer w0.127: v1(98.42,153.76) 98.422,153.898 97.52,154.8 97.52,157.86 100.68,161.02 114.06,161.02 v3(117.48,157.6) ; R13.2@128.016,157.314 128.016,157.996 v1(128.42,158.4)
RTSON: R2.2 R40.2 R82.2 U1.6 U18.44 U19.42 U33.10 | length 259.3
  Top Layer w0.127: v2(50.122,106.321) 50.402,106.321 50.862,105.861 50.862,104.421 58.021,104.421 60.58,106.98 62.16,106.98 62.3,106.84 65.72,106.84 65.9,107.02 68.86,107.02 69.9,108.06 v1(69.9,110.88) ; U33.10@51.28,112.287 51.28,109.603 52.016,108.867 52.016,106.967 52.422,106.561 52.422,104.561 52.282,104.421 ; U19.42@66.004,149.602 65.178,149.602 64.24,150.54 61.58,150.54 61.08,151.04 61.08,156.22 ; v3(79,135.4) 79,136.64 74.82,140.82 70.2,140.82 66.96,144.06 55.6,144.06 55.02,144.64 55.02,152.38 58.86,156.22 61.08,156.22 ; v1(80.88,159.48) 80.52,159.12 77.02,159.12 76.54,159.6 64.46,159.6 61.769,156.909 61.08,156.22 ; v3(85.54,162.8) 87.81,162.8 R2.2@88.558,162.052 ; U1.6@87.974,164.144 88.316,164.144 88.558,163.902 R2.2@88.558,162.052 ; v3(91.28,162.54) 91.28,161.38 91.12,161.22 89.48,161.22 88.648,162.052 R2.2@88.558,162.052 ; v1(123.02,162.9) 123.02,161.46 123.258,161.222 126.883,161.222 127.475,161.814 131.054,161.814 132.64,163.4 138.9,163.4 140.16,162.14 143.66,162.14 148.44,157.36 149.16,157.36 150.876,155.644 R40.2@150.876,152.234
  Bottom Layer w0.127: U18.44@50.026,108.073 50.026,106.417 v2(50.122,106.321) ; R82.2@73.826,81.788 69.42,86.194 69.42,93.52 68.68,94.26 68.68,104.82 68.92,105.06 68.92,109.38 69.9,110.36 69.9,111.16 72.1,113.36 72.1,125.4 79,132.3 v3(79,135.4) ; v1(80.88,159.48) 80.88,159.7 82.68,161.5 84.24,161.5 v3(85.54,162.8) ; v3(91.28,162.54) 94.466,162.54 97.226,165.3 120.62,165.3 v1(123.02,162.9)
RXD0: U2.T17 U13.9 | length 52.7
  Top Layer w0.127: U2.T17@107.95,151.892 107.95,151.9 v1(108.58,152.53) ; v1(114.5,156.72) 114.6,156.72 114.92,157.04 116.02,157.04 124.2,165.22 125.3,165.22 125.62,164.9 143.92,164.9 146.525,162.295 U13.9@153.697,162.295
  Bottom Layer w0.127: v1(108.58,152.53) 108.58,152.86 112.16,156.44 114.26,156.44 v1(114.5,156.72)
RXD0-RS232: J5.2 U13.8 | length 8.1
  Top Layer w0.127: U13.8@160.247,162.295 163.485,162.295 164.514,161.266 J5.2@167.896,161.266
RXD1: U2.U18 U7.12 U8.4 | length 77.1
  Top Layer w0.127: U2.U18@109.22,153.162 109.22,153.2 109.84,153.82 110.84,153.82 111.12,154.1 111.12,154.661 111.539,155.08 112.08,155.08 112.44,155.44 112.44,156.532 113.456,157.548 115.808,157.548 123.857,165.597 ; 123.857,165.597 124.761,166.5 v3(125.9,166.5) ; v3(127.4,168.48) 130.3,168.48 135.373,173.553 140.473,173.553 143.6,176.68 170.86,176.68 v3(171.44,177.26) ; v3(171.62,178.66) 171.808,178.848 U8.4@173.736,178.848
  Bottom Layer w0.127: v3(125.9,166.5) 127.4,168 v3(127.4,168.48) ; v3(171.44,177.26) 171.62,177.44 v3(171.62,178.66)
RXD1-RS232: P7.3 U7.13 | length 13.5
  Top Layer w0.127: U7.13@138.457,172.903 139.643,172.903 140.039,173.299 141.079,173.299 v3(141.18,173.4)
  Bottom Layer w0.127: P7.3@140.716,182.88 139.64,181.804 139.64,179.019 140.68,177.979 140.68,173.9 v3(141.18,173.4)
RXD2: U2.W20 U9.9 | length 53.9
  Top Layer w0.127: U2.W20@111.76,155.702 111.76,156.211 113.351,157.802 115.682,157.802 124.92,167.04 147.46,167.04 148.762,168.342 148.762,173.362 150.903,175.503 U9.9@154.205,175.503
RXD2-RS232: P6.3 U9.8 | length 9.5
  Top Layer w0.127: v3(159.02,175.88) 159.397,175.503 U9.8@160.755,175.503
  Bottom Layer w0.127: P6.3@157.48,182.88 158.68,181.68 158.68,177.64 159.02,177.3 v3(159.02,175.88)
S\D\_\C\S\: P10.1 R93.2 U2.F18 | length 81
  Top Layer w0.127: v1(94.61,153.8) 95.248,153.162 U2.F18@95.25,153.162 ; v3(120.56,143.66) 127.2,143.66 130.62,140.24 140.518,140.24 R93.2@141.566,139.192 141.566,135.274 143.593,133.247 P10.1@146.043,133.247
  Bottom Layer w0.127: v1(94.61,153.8) 94.61,154.13 96.106,155.626 96.106,159.326 97.36,160.58 98.803,160.58 100.383,162.16 115.82,162.16 119.14,158.84 119.14,157.802 118.488,157.15 118.488,151.85 119.311,151.027 120.323,150.016 120.323,145.276 120.56,145.038 v3(120.56,143.66)
SCLK1: P2.4 P10.5 U2.W15 U3.14 U22.11 U32.6 | length 217.4
  Top Layer w0.127: U22.11@45.212,155.852 46.452,155.852 47.206,156.606 50.654,156.606 v3(50.92,156.34) ; v3(51.52,159.28) 51.601,159.28 52.481,160.16 55.24,160.16 58.1,163.02 58.1,164.26 58.54,164.7 81.98,164.7 81.98,164.66 v3(83.08,163.56) ; U2.W15@111.76,149.352 111.912,149.352 112.46,149.9 113.46,149.9 113.7,149.66 113.7,149.12 114.992,147.828 127.03,147.828 127.941,148.739 129.401,148.739 130.482,149.82 142.44,149.82 144.168,151.548 P2.4@144.168,153.384 143.876,153.384 142.88,154.38 ; v1@122.44,162.32 v1(122.42,162.32) 122.42,161.496 122.948,160.968 126.988,160.968 127.58,161.56 134.8,161.56 134.98,161.74 135.98,161.74 136.76,162.52 139.14,162.52 142.88,158.78 142.88,154.38 ; U3.14@130.708,153.032 v3(132.108,153.032) ; v3(140.16,156.96) 140.16,155.68 141.46,154.38 142.88,154.38 ; P10.5@146.043,123.247 148.527,123.247 149.52,124.24 149.52,137.68 v3(148.2,139)
  Bottom Layer w0.127: v3(50.92,156.34) 50.92,158.68 v3(51.52,159.28) ; v3(83.08,163.56) 84.282,163.56 84.662,163.94 88.149,163.94 90.066,162.023 94.308,162.023 97.305,165.02 119.72,165.02 v1(122.42,162.32) ; v3(132.108,153.032) 134.036,154.96 135.22,154.96 135.34,154.84 139.7,154.84 140.16,155.3 v3(140.16,156.96) ; U32.6@144.698,161.786 142.646,161.786 142.2,161.34 142.2,157.86 143.12,156.94 143.12,154.52 144.168,153.472 144.168,153.332 145.58,151.92 145.58,141.44 v3(148.2,139)
SD_DI: P2.6 P10.2 U2.V15 U3.15 U22.12 U32.5 | length 204.4
  Top Layer w0.127: U22.12@45.212,156.502 46.743,156.502 47.101,156.86 51.4,156.86 v3(51.82,156.44) ; v3(52.06,158.44) 52.06,159.38 52.52,159.84 56.266,159.84 58.946,162.52 80.14,162.52 81.4,163.78 v3(81.4,164.18) ; U2.V15@110.49,149.352 110.49,149.36 v1(111.12,149.99) ; v1(115.26,148.6) 115.778,148.082 126.924,148.082 127.839,148.997 129.299,148.997 130.382,150.08 139.86,150.08 141.628,151.848 P2.6@141.628,153.384 ; v3(123.84,161.76) 126.56,161.76 128.5,163.7 143.22,163.7 146.68,160.24 v3(146.68,160.06) ; U3.15@130.708,153.682 131.65,153.682 132.046,154.078 133.782,154.078 134.66,153.2 134.66,151.54 v3(134.98,151.22) ; v3(136.18,150.4) 136.56,150.08 ; P10.2@146.043,130.747 148.367,130.747 148.86,131.24 148.86,137.1 v3(146.9,139.06)
  Bottom Layer w0.127: v3(51.82,156.44) 51.82,158.2 v3(52.06,158.44) ; v3(81.4,164.18) 81.4,164.2 82.98,165.78 96.628,165.78 97.868,167.02 99.9,167.02 100.78,166.14 121.3,166.14 124.118,163.322 124.118,162.038 v3(123.84,161.76) ; v1(111.12,149.99) 111.29,149.99 111.8,150.5 112.28,150.5 113.12,149.66 114.86,149.66 115.26,149.26 v1(115.26,148.6) ; v3(134.98,151.22) 135.36,151.22 v3(136.18,150.4) ; v3(146.68,160.06) 146.68,162.62 146.244,163.056 142.656,163.056 141.8,162.2 141.8,157.7 142.66,156.84 142.66,154.416 P2.6@141.628,153.384 141.628,151.412 143.06,149.98 143.06,144.64 145.04,142.66 145.04,140.92 v3(146.9,139.06)
SD_DO: P2.10 P10.7 U2.U14 U3.16 U32.2 | length 97.2
  Top Layer w0.127: U2.U14@109.22,148.082 109.22,148.09 v1(109.85,148.72) ; v1(116.34,148.62) 117.082,148.62 117.366,148.336 126.819,148.336 127.743,149.26 129.203,149.26 130.283,150.34 135.34,150.34 136.548,151.548 P2.10@136.548,153.384 ; U3.16@130.708,154.332 v3(134.528,154.332) ; P10.7@146.043,118.397 148.697,118.397 150.1,119.8 150.1,138.5 v3(150.08,138.52)
  Bottom Layer w0.127: v1(109.85,148.72) 109.85,148.69 110.46,148.08 113.7,148.08 113.86,147.92 115.64,147.92 v1(116.34,148.62) ; v3(134.528,154.332) 135.6,154.332 P2.10@136.548,153.384 136.756,153.384 140.6,149.54 142.22,149.54 142.806,148.954 142.806,143.794 144.56,142.04 144.56,140.02 146.34,138.24 149.8,138.24 v3(150.08,138.52) ; P2.10@136.564,153.384 137.449,154.269 137.66,154.48 139.96,154.48 140.565,155.085 140.565,156.625 141.28,157.34 141.28,160 140.764,160.516 U32.2@139.498,160.516
SDCLK: R5.2 U14.38 U15.38 U16.38 U17.38 | length 55.4
  Top Layer w0.127: U15.38@63.202,115.24 67.02,115.24 67.16,115.1 69.34,115.1 69.6,114.84 77.66,114.84 78.06,115.24 80.5,115.24 80.9,114.84 93.52,114.84 93.92,115.24 96.301,115.24 96.841,114.7 98.62,114.7 98.76,114.84 109.58,114.84 110,115.26 U16.38@111.442,115.26
  Bottom Layer w0.127: v1(93.64,114.96) 94.42,114.96 96.012,116.552 R5.2@96.012,119.546
SDCLKEN: U2.D4 U14.37 U15.37 U16.37 U17.37 | length 71.9
  Top Layer w0.127: U15.37@63.202,116.04 67.02,116.04 67.18,116.2 68.58,116.2 69.14,115.64 77.44,115.64 77.84,116.04 80.54,116.04 80.94,115.64 81.06,115.64 89.6,115.64 92.08,115.64 92.44,115.64 92.86,116.06 v1(93.8,116.06) ; v1(92.08,134.744) 92.08,134.752 U2.D4@92.71,135.382 ; v1@93.85,116.01 93.88,116.04 U14.37@95.206,116.04 96.241,116.04 96.495,115.786 97.394,115.786 97.68,115.5 98.426,115.5 98.566,115.64 109.52,115.64 109.92,116.04 U16.37@111.462,116.04
  Bottom Layer w0.127: v1(92.08,134.744) 92.044,134.744 91.38,134.08 91.38,130.96 92.952,129.388 92.952,128.448 94.906,126.494 94.906,125.614 95.179,125.341 95.39,125.131 95.449,125.131 95.66,124.92 95.66,124.44 94.652,123.432 94.652,117.191 93.8,116.339 v1(93.8,116.06)
SDIN: R19.1 U2.Y16 U22.7 | length 103.7
  Top Layer w0.127: U22.7@45.212,153.252 R19.1@49.454,153.252 ; R19.1@49.784,153.582 50.142,153.582 v3(51.08,154.52) ; v3(52.6,159.18) 55.965,159.18 59.005,162.22 81.62,162.22 v3(82.38,162.98) ; U2.Y16@113.03,150.622 115.062,150.622 116.92,152.48 116.92,152.78 117.726,153.586 119.587,153.586 119.961,153.96 v1(120.3,153.96)
  Bottom Layer w0.127: v3@51.08,154.54 v3(51.08,154.52) 52.58,156.02 52.58,158.78 52.6,158.8 v3(52.6,159.18) ; v3(82.38,162.98) 84.061,162.98 84.741,163.66 88.055,163.66 89.946,161.769 94.413,161.769 97.404,164.76 119.24,164.76 122.28,161.72 122.28,159.53 120.924,158.174 120.924,157.012 120.8,156.888 120.8,156.1 120.04,155.34 120.04,154.26 120.3,154 v1(120.3,153.96)
SFRM1: P2.8 R25.1 U2.Y17 U31.1 | length 43.5
  Top Layer w0.127: U2.Y17@113.03,151.892 114.308,151.892 v1(114.92,151.28) ; v1(118.02,148.86) 118.156,148.86 118.426,148.59 126.714,148.59 127.684,149.56 129.144,149.56 130.184,150.6 135.18,150.6 135.5,150.92 135.5,154.02 135.88,154.4 138.072,154.4 ; R25.1@137.326,150.876 138.14,151.69 138.14,151.92 139.088,152.868 P2.8@139.088,153.384 138.072,154.4 ; U31.1@139.212,161.594 139.212,160.792 138.5,160.08 138.5,157.32 138.072,156.892 138.072,154.4
  Bottom Layer w0.127: v1(114.92,151.28) 114.92,151.037 115.417,150.54 116.339,150.54 116.839,150.04 117.46,150.04 118.02,149.48 v1(118.02,148.86)
SPCLK: J14.2 P13.5 R149.1 U2.T4 U28.26 | length 128.7
  Top Layer w0.127: U2.T4@107.95,135.382 v1@108.58,134.752 ; v1(112.32,127.88) 112.32,127.04 112.72,126.64 113.874,126.64 114.606,127.372 127.048,127.372 127.44,126.98 128.94,126.98 129.486,127.526 137.234,127.526 137.42,127.34 v3@138.48,127.34 ; v3@138.5,127.36 139.263,128.123 139.52,128.38 139.52,129.039 139.62,129.139 v3(139.62,131.14) ; R149.1@164.426,105.664 164.96,105.13 v3(164.96,104.7)
  Bottom Layer w0.127: v1@108.58,134.74 109.22,134.1 109.22,133.28 112.32,130.18 v1(112.32,127.88) ; v3(138.48,127.36) 138.48,117.459 140.385,115.554 143.779,112.16 148.02,112.16 154.18,106 157,106 158.846,104.154 158.846,102.534 158.98,102.4 158.98,101.078 160.54,99.518 160.54,93.82 162.888,91.472 P13.5@168.656,91.472 ; v3(139.62,131.14) 140.796,132.436 J14.2@162.536,132.436 ; 158.44,104.56 161.5,104.56 161.78,104.84 162.44,104.84 162.47,104.81 164.85,104.81 v3(164.96,104.7)
  other v1: 108.58,134.75
TCK: P8.9 P8.11 R41.1 U2.W12 | length 36.6
  Top Layer w0.127: U2.W12@111.76,145.542 111.76,145.56 112.46,146.26 113.548,146.26 113.846,146.558 126.662,146.558 v3(126.94,146.28) ; v3(128.42,147.66) 128.78,147.3 140.228,147.3 P8.9@141.732,145.796 ; R41.1@141.732,143.598 P8.9@141.732,145.796 ; P8.11@144.272,145.796 P8.9@141.732,145.796
  Bottom Layer w0.127: v3(126.94,146.28) 127.04,146.28 v3(128.42,147.66)
TDI: P8.5 R45.1 U2.V12 | length 30.1
  Top Layer w0.127: U2.V12@110.49,145.542 110.498,145.542 111.1,144.94 115.96,144.94 116.58,145.56 119.22,145.56 119.42,145.36 123.318,145.36 123.563,145.115 126.915,145.115 127.34,145.54 v3(127.52,145.54) ; v3(128.66,146.34) 129.06,146.74 135.36,146.74 136.304,145.796 P8.5@136.652,145.796 R45.1@136.652,143.598
  Bottom Layer w0.127: v3(127.52,145.54) 127.86,145.54 v3(128.66,146.34)
TDO: P8.13 R39.1 U2.Y13 | length 37.4
  Top Layer w0.127: U2.Y13@113.03,146.812 127.248,146.812 131.3,142.76 144.96,142.76 145.454,143.254 145.454,144.438 P8.13@146.812,145.796
TMS: P8.7 R42.1 U2.W13 | length 30.6
  Top Layer w0.127: U2.W13@111.76,146.812 112.232,146.812 112.84,147.42 113.66,147.42 114.014,147.066 127.494,147.066 127.56,147 137.16,147 138.364,145.796 P8.7@139.192,145.796 R42.1@139.192,143.598
TXD0: U2.V20 U13.10 | length 55.3
  Top Layer w0.127: U2.V20@110.49,155.702 110.502,155.702 113.11,158.31 115.47,158.31 125.06,167.9 ; 125.061,167.9 125.641,168.48 v3(126.46,168.48) ; v3(126.32,164.32) 126.54,164.32 126.866,164.646 143.815,164.646 146.816,161.645 U13.10@153.697,161.645
  Bottom Layer w0.127: v3(126.32,164.32) 126,164.64 126,165.64 125.38,166.26 125.38,166.9 125.64,167.16 126.2,167.16 126.46,167.42 v3(126.46,168.48)
TXD0-RS232: J5.3 U13.7 | length 9.1
  Top Layer w0.127: U13.7@160.247,161.645 162.005,161.645 162.2,161.84 163.56,161.84 165.686,159.714 166.678,159.714 J5.3@167.896,158.496
TXD1: U2.U19 U7.11 U8.3 | length 74.8
  Top Layer w0.127: U2.U19@109.22,154.432 109.22,154.52 109.8,155.1 109.8,155.94 111.1,157.24 111.642,157.24 112.966,158.564 115.364,158.564 124.76,167.96 ; 124.761,167.96 125.881,169.08 130.541,169.08 135.664,174.203 140.764,174.203 143.501,176.94 170.06,176.94 170.968,177.848 U8.3@173.736,177.848
TXD1-RS232: P7.5 U7.14 | length 13.3
  Top Layer w0.127: U7.14@138.457,172.253 140.053,172.253 v3(140.42,172.62)
  Bottom Layer w0.127: P7.5@138.176,182.88 139.34,181.716 139.34,178.96 140.42,177.88 v3(140.42,172.62)
TXD2: U2.T18 U9.10 | length 58.2
  Top Layer w0.127: U2.T18@107.95,153.162 107.95,153.17 v1(108.58,153.8) ; v1(113.64,157) 113.892,157 114.186,157.294 115.914,157.294 124.024,165.404 124.141,165.52 125.82,165.52 127.06,166.76 147.594,166.76 149.016,168.182 149.016,173.257 150.612,174.853 U9.10@154.205,174.853
  Bottom Layer w0.127: v1(108.58,153.8) 108.6,153.8 111.8,157 v1(113.64,157)
TXD2-RS232: P6.5 U9.7 | length 11.4
  Top Layer w0.127: v3(158.14,176.02) 158.14,175.86 159.147,174.853 U9.7@160.755,174.853
  Bottom Layer w0.127: P6.5@154.94,182.88 156.22,181.6 156.22,179.16 158.14,177.24 v3(158.14,176.02)
USB_DM: R161.2 U33.5 | length 20.8
  Top Layer w0.127: 47.786,109.524 47.662,109.4 47.662,106.966 47.142,106.446 47.142,102.378 52.86,96.66 53.874,96.66 R161.2@54.522,96.012 ; 47.786,109.525 48.962,110.701 48.962,111.221 48.78,111.403 U33.5@48.78,112.287
USB_DP: R162.2 U33.6 | length 20.3
  Top Layer w0.127: U33.6@49.28,112.287 49.28,111.283 49.216,111.219 49.216,110.595 47.92,109.299 47.92,106.865 47.396,106.341 47.396,102.504 52.98,96.92 53.906,96.92 R162.2@54.522,97.536
USB_RPU: R151.2 U33.7 | length 11.2
  Top Layer w0.127: U33.7@49.78,112.287 49.78,110.238 48.258,108.717 48.258,106.397 47.862,106.001 47.862,104.581 48.022,104.421 49.28,104.421 R151.2@50.122,105.263
USB_RREF: R152.1 U33.8 | length 7.8
  Top Layer w0.127: R152.1@48.598,105.263 48.522,105.339 48.522,108.621 50.28,110.379 U33.8@50.28,112.287
USB_XTALI: C207.2 R150.2 U33.60 Y5.1 | length 13.3
  Top Layer w0.127: Y5.1@39.116,111.574 39.16,111.618 39.16,115.52 39.777,116.137 U33.60@45.666,116.137
  Bottom Layer w0.127: R150.2@38.1,114.974 38.594,114.48 v3(39.16,114.48) 38.95,114.27 C207.2@38.95,113.284
USB_XTALO: C208.2 R150.1 U33.59 Y5.2 | length 11.6
  Top Layer w0.127: Y5.2@39.116,120.074 39.116,117.324 39.803,116.637 U33.59@44.93,116.637
  Bottom Layer w0.127: R150.1@38.1,116.674 38.566,117.14 v3(39.3,117.14) 38.95,117.49 C208.2@38.95,118.364
USBM1: U2.T16 U11.3 | length 178.4
  Top Layer w0.127: v3(52.74,140.9) 52.48,141.16 52.48,151.96 54.66,154.14 v3(55.02,154.16) ; U2.T16@107.95,150.622 107.95,150.63 108.58,151.26 v1(109.82,151.26) ; v1(115.76,154.96) 116.034,154.686 116.126,154.686 116.634,155.194 119.514,155.194 120.12,155.8 120.979,155.8 121.479,155.3 121.819,155.3 122.039,155.08 v1(122.58,155.08)
  Bottom Layer w0.127: U11.3@46.294,97.447 46.294,99.086 41.64,103.74 41.64,112.04 44.46,114.86 44.46,118.34 42.18,120.62 42.18,129.5 52.38,139.7 52.38,140.54 v3(52.74,140.9) ; v3(55.02,154.16) 55.02,154.68 55.747,155.407 55.747,166.547 56.56,167.36 91.48,167.36 92.22,168.1 99.62,168.1 101.187,166.533 121.289,166.533 124.372,163.45 124.372,161.057 123.3,159.985 123.3,155.8 v1(122.58,155.08) ; v1(109.82,151.26) 109.3,151.78 109.3,152.76 111.02,154.48 115.28,154.48 v1(115.76,154.96)
USBM2: U2.D17 U10.3 | length 112.1
  Top Layer w0.127: v3(54,141.96) 53.78,142.18 53.78,151.8 61.98,160 77.48,160 78.04,159.44 79.94,159.44 80.5,160 83.22,160 84.36,158.86 v1(84.36,157.54) v1@84.38,157.56 ; v1(92.07,152.53) 92.072,152.53 U2.D17@92.71,151.892
  Bottom Layer w0.127: 48.748,134.948 48.748,134.969 53.6,139.821 53.6,141.56 v3(54,141.96) ; 49.24,135.44 43.154,129.354 43.154,121.265 45.22,119.199 45.22,114.48 42.534,111.794 42.534,105.466 49.342,98.658 U10.3@49.342,97.447 ; v1(84.36,157.54) 84.62,157.54 85.133,157.027 85.133,156.767 85.32,156.58 87.699,156.58 89.939,154.34 91.24,154.34 91.44,154.14 91.44,153.34 92.07,152.71 v1(92.07,152.53)
USBP1: U2.Y19 U11.1 | length 172.1
  Top Layer w0.127: v3(51.88,140.78) 52.22,141.12 52.22,152.059 53.16,153 ; 52.786,152.626 54.212,154.052 54.46,154.3 v3(54.46,154.78) ; U2.Y19@113.03,154.432 116.332,154.432 116.84,154.94 119.62,154.94 120.22,155.54 120.88,155.54 121.38,155.04 121.72,155.04 122.26,154.5 122.671,154.5 123.131,154.96 v1(123.28,154.96)
  Bottom Layer w0.127: U11.1@44.994,97.447 44.994,98.734 45.56,99.3 45.56,99.46 41.38,103.64 41.38,112.139 44.206,114.965 44.206,118.234 41.92,120.52 41.92,129.6 52.12,139.8 52.12,140.54 v3(51.88,140.78) ; v3(54.46,154.78) 54.74,154.78 55.48,155.52 55.48,166.66 56.44,167.62 91.381,167.62 92.121,168.36 99.728,168.36 101.301,166.787 121.394,166.787 124.626,163.555 124.626,160.952 123.554,159.88 123.554,155.234 v1(123.28,154.96)
USBP2: U2.C18 U10.1 | length 110
  Top Layer w0.127: v3(53.14,141.94) 53.526,142.326 53.526,151.906 61.88,160.26 77.579,160.26 78.145,159.694 79.819,159.694 80.385,160.26 83.32,160.26 84.7,158.88 84.7,158.06 84.9,157.86 84.9,157 v1(84.62,156.72) ; v1(90.8,153.8) 90.802,153.8 U2.C18@91.44,153.162
  Bottom Layer w0.127: U10.1@48.042,97.447 48.042,98.782 48.38,99.12 48.38,99.24 42.28,105.34 42.28,111.94 44.96,114.62 44.96,119.1 42.9,121.16 42.9,129.48 53.34,139.92 53.34,141.74 v3(53.14,141.94) ; v1(84.62,156.72) 85.02,156.32 87.6,156.32 90.12,153.8 v1(90.8,153.8)
V1: C220.1 P13.13 U34.1 U34.2 | length 241.7
  Top Layer w0.25: v2(35.592,169.672) 37.732,169.672 43.98,175.92 52.86,175.92 59.62,182.68 74,182.68 v2(74.28,182.96) ; v2(150.16,164.42) 151.28,164.42 152.86,166 170.14,166 172.48,163.66 172.48,144.34 169.22,141.08 169.22,110.28 171.18,108.32 171.18,104.48 171.9,103.76 171.9,91.097 171.86,91.057 v2(171.86,90.38)
  Bottom Layer w0.127: P13.13@168.656,87.472 169.752,87.472 171.86,89.58 v2(171.86,90.38)
  Bottom Layer w0.25: v2(74.28,182.96) 74.28,182.08 75.5,180.86 78.62,180.86 79.22,181.46 103.02,181.46 105.24,179.24 129.84,179.24 141.86,167.22 145.24,167.22 148.04,164.42 v2(150.16,164.42)
  Bottom Layer w0.4: C220.1@34.478,169.672 v2(35.592,169.672) 37.338,171.418 ; U34.1@37.338,173.313 37.338,171.418 ; U34.2@38.608,173.313 38.608,171.828 38.198,171.418 37.338,171.418
V2: C221.1 P13.14 U34.6 U34.7 | length 226.8
  Top Layer w0.25: v2(45.146,175.126) 53.106,175.126 60,182.02 74.7,182.02 v2(75.02,182.34) ; v2(149.3,165.08) 151.14,165.08 152.48,166.42 170.32,166.42 172.9,163.84 172.9,144.14 169.863,141.103 169.863,110.197 172.48,107.58 v2(172.48,91.28)
  Bottom Layer w0.127: P13.14@168.656,86.972 169.692,86.972 172.48,89.76 v2(172.48,91.28)
  Bottom Layer w0.25: v2(75.02,182.34) 78.72,182.34 79.08,181.98 103.4,181.98 105.64,179.74 130.26,179.74 142.16,167.84 145.62,167.84 148.38,165.08 v2(149.3,165.08)
  Bottom Layer w0.4: U34.6@43.688,173.313 43.688,174.768 43.88,174.96 v2@44.98,174.96 ; U34.7@44.958,173.313 44.958,174.938 v2(45.146,175.126) C221.1@45.146,176.276
V3: C222.1 P13.15 U34.8 U34.9 | length 236.7
  Top Layer w0.25: v2(46.289,166.789) 46.289,170.989 49.2,173.9 53.86,173.9 60.46,180.5 73.36,180.5 v2(73.5,180.36) ; v2(150.18,165.76) 150.92,165.76 151.96,166.8 170.56,166.8 173.3,164.06 173.3,143.76 170.523,140.983 170.523,110.157 173.02,107.66 173.02,99.54 173.1,99.46 173.1,90.92 173.02,90.84 v2(173.02,90.34)
  Bottom Layer w0.127: P13.15@168.656,86.472 169.672,86.472 173.02,89.82 v2(173.02,90.34)
  Bottom Layer w0.25: v2(73.5,180.36) 73.5,183.1 74.04,183.64 77.96,183.64 79.12,182.48 103.82,182.48 106.02,180.28 130.56,180.28 142.331,168.509 146.031,168.509 148.78,165.76 v2(150.18,165.76)
  Bottom Layer w0.4: U34.9@43.688,168.063 43.688,166.712 44,166.4 45.9,166.4 47.14,167.64 C222.1@47.31,167.64 ; U34.8@44.958,168.063 44.958,166.402 44.96,166.4